# Altium PCB jp_2021.3.10.PcbDoc
Units mil, origin at the board's own origin, x right, y up, seen from the top; angles counter-clockwise.
Board outline 267.72 x 984.25 mil, 2 copper layers (Top Layer, Bottom Layer); 4 components, 16 nets, 32 pads, 0 vias.
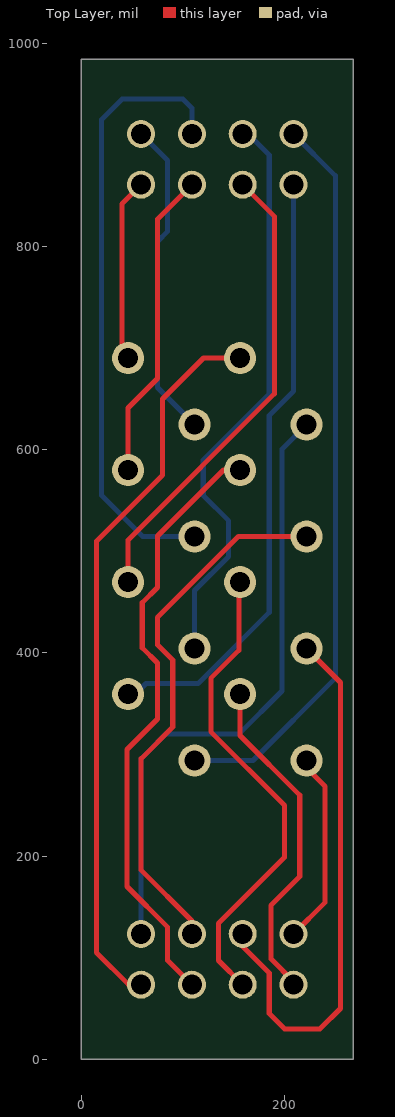
[diagram p0: Top Layer view]
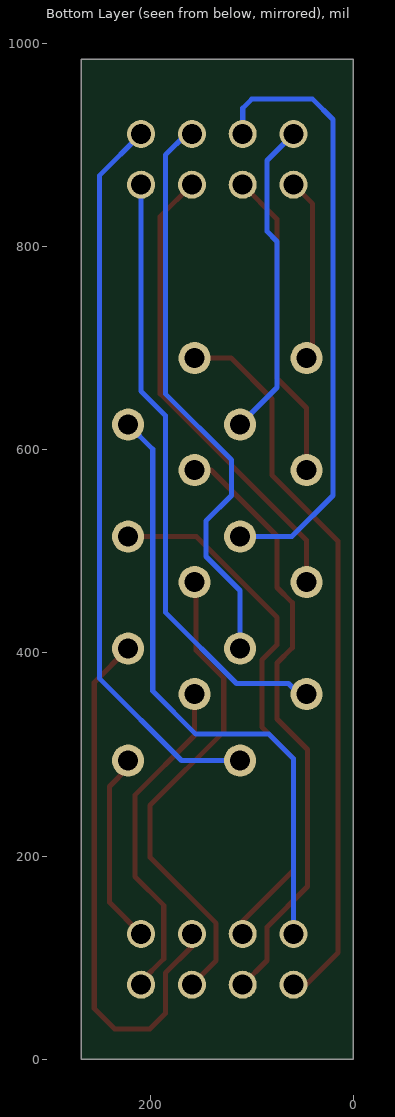
[diagram p1: Bottom Layer view, seen from below]

## Layer stack, top to bottom
Top Solder: solder mask 0.4, Solder Resist, Dk 3.5
Top Layer: signal copper 1.4
Dielectric 1: dielectric 12.6, FR-4, Dk 4.8
Bottom Layer: signal copper 1.4
Bottom Solder: solder mask 0.4, Solder Resist, Dk 3.5

## Board outline
0,0 267.72,0 267.72,984.25 0,984.25

## Design rules (kind name [scope] priority, off if disabled: settings)
Clearance [All] p1: gap=6 ignorepadtopadclearanceinfootprint=FALSE
PolygonConnect [All] p1: connectstyle=Relief reliefconductorwidth=10 reliefentries=4 polygonreliefangle="90 Angle" airgapwidth=10
RoutingVias [All] p1: holewidth=28 width=50 viastyle="Through Hole" minholewidth=28 minwidth=50 maxholewidth=28 maxwidth=50
SolderMaskExpansion [All] p1: expansion=4
Width [All] p1: maxlimit=10 minlimit=5 preferedwidth=5
30 further rules are at their usual default settings.

## Classes and differential pairs
component class jp_2021.3.10: j1

## Components (designator, comment, footprint, x,y, rotation, side; value= is the part's Value field where it differs from the comment)
J1 "row A" "row A" 46.02,690.2 r0 top
J2 "row B" "row B" 58.86,860.83 r0 top
J3 "row B" "row B" 58.86,73.43 r0 top
J4 "row A" "row A" 111.46,624.76 r0 top

## Footprints (in the part's own frame and the unit in brackets; to place one, negate y for a bottom-side part, rotate by r counter-clockwise, add the part's x,y. Pads: shape width x height; smd on the part's side, far side on the other; paste and mask are expansions set on the pad)
"row A" [mm]
  round 0.8 hole 0.5: 1(0,0) 2(0,-2.8) 3(0,-5.6) 4(0,-8.4) 5(2.8,0) 6(2.8,-2.8) 7(2.8,-5.6) 8(2.8,-8.4)
"row B" [mm]
  round 0.7 hole 0.5 mask+0.102: 1(0,0) 2(1.27,0) 3(2.54,0) 4(3.81,0) 5(0,1.27) 6(1.27,1.27) 7(2.54,1.27) 8(3.81,1.27)

## Nets (pads, with @x,y where several pads share a name; then routed paths per layer and width w, separated by ;. In a path a pad name is that pad's centre, name@x,y a point inside that pad or via, vN(x,y) a via of type N, cw(c..) or ccw(c..) an arc to the next point about the centre after c; other vN are vias at no path point)
P1: J1.1 J2.1 | length 180.9
  Top Layer w5: J1.1 40,696.22 40,841.97 J2.1
P2: J1.2 J2.2 | length 306.9
  Top Layer w5: J1.2 46.02,641.02 75,670 75,826.97 J2.2
P3: J1.3 J2.3 | length 463.6
  Top Layer w5: J1.3 46.02,511.02 190,655 190,829.69 J2.3
P4: J1.4 J2.4 | length 603
  Bottom Layer w5: J1.4 53.19,359.49 63.71,370 115,370 185,440 185,633.79 208.86,657.65 J2.4
P5: J1.5 J3.1 | length 721.8
  Top Layer w5: J3.1 46.57,73.43 15,105 15,510 80,575 80,650 120.2,690.2 J1.5
P6: J1.6 J3.2 | length 603
  Top Layer w5: J3.2 85,97.28 85,130 45,170 45,305 75,335 75,390 60,405 60,449.41 75,464.41 75,515 139.96,579.96 J1.6
  Bottom Layer w5: J3.2@107.48,74.8 J3.2
P7: J1.7 J3.3 | length 475
  Top Layer w5: J1.7 155,468.46 155,402.5 127.5,375 127.5,322.5 200,250 200,198.86 135,133.86 135,97.28 J3.3
P8: J1.8 J3.4 | length 331.4
  Top Layer w5: J1.8 156.26,318.74 215,260 215,180 186.58,151.58 186.58,98.98 208.86,76.7 J3.4
P11: J2.5 J4.1 | length 316.1
  Bottom Layer w5: J2.5 85,884.69 85,815 75,805 75,661.22 J4.1
P21: J2.6 J4.2 | length 604.3
  Bottom Layer w5: J2.6 108.86,936.14 100,945 40,945 20,925 20,555 60.47,514.53 J4.2
P31: J2.7 J4.3 | length 571.7
  Bottom Layer w5: J4.3 111.46,461.46 145,495 145,530 120,555 120,590 185,655 185,890 164.17,910.83 J2.7
P41: J2.8 J4.4 | length 724.9
  Bottom Layer w5: J4.4 169.06,294.06 250,375 250,869.69 J2.8
P51: J3.5 J4.5 | length 611
  Bottom Layer w5: J3.5 58.86,295.93 82.93,320 155,320 197.44,362.44 197.44,600.52 J4.5
P61: J3.6 J4.6 | length 531
  Top Layer w5: J3.6 108.86,136.14 58.86,186.14 58.86,295.93 90,327.07 90,392.93 75,407.93 75,435 154.53,514.53 J4.6
P71: J3.7 J4.7 | length 541.8
  Top Layer w5: J3.7 158.86,111.14 185,85 185,45 200,30 235,30 255,50 255,370.98 J4.7
P81: J3.8 J4.8 | length 191.1
  Top Layer w5: J3.8 240,154.57 240,268.58 221.69,286.89 J4.8

## Silkscreen, mask and mechanical layers (free items; w line width, h text height)
Mechanical 1:
  circle w5: c133.86,246.06 r17.72
  circle w5: c133.86,738.19 r17.72
  lines w5: 0,0 267.72,0 267.72,984.25 0,984.25 0,0 ; 94.49,196.85 94.49,216.54 173.23,216.54 173.23,196.85 94.49,196.85 ; 94.49,767.72 173.23,767.72 173.23,787.4 94.49,787.4 94.49,767.72